# Altium PCB WAVE_RESHAPE.PcbDoc
Units mil, origin at the board's own origin, x right, y up, seen from the top; angles counter-clockwise.
Board outline 10535 x 6300 mil, 2 copper layers (Top Layer, Bottom Layer), stack 61.811 mil thick; 29 components, 21 nets, 80 pads, 3 vias.
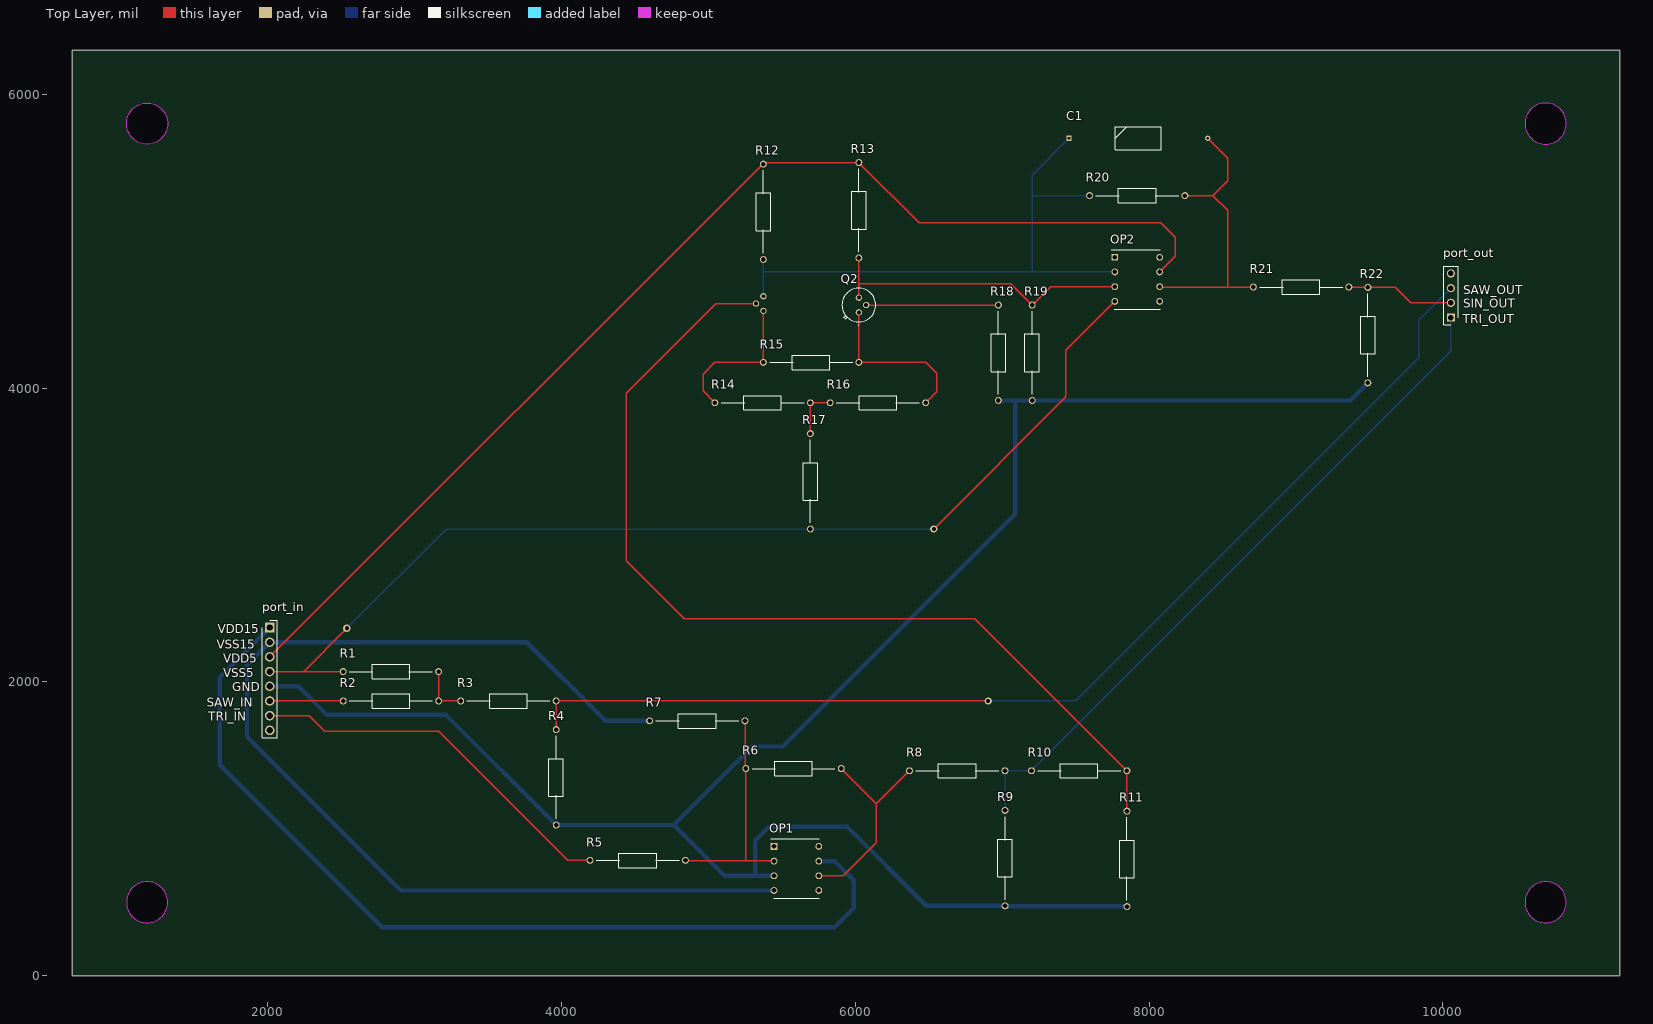
[diagram p0: Top Layer view]
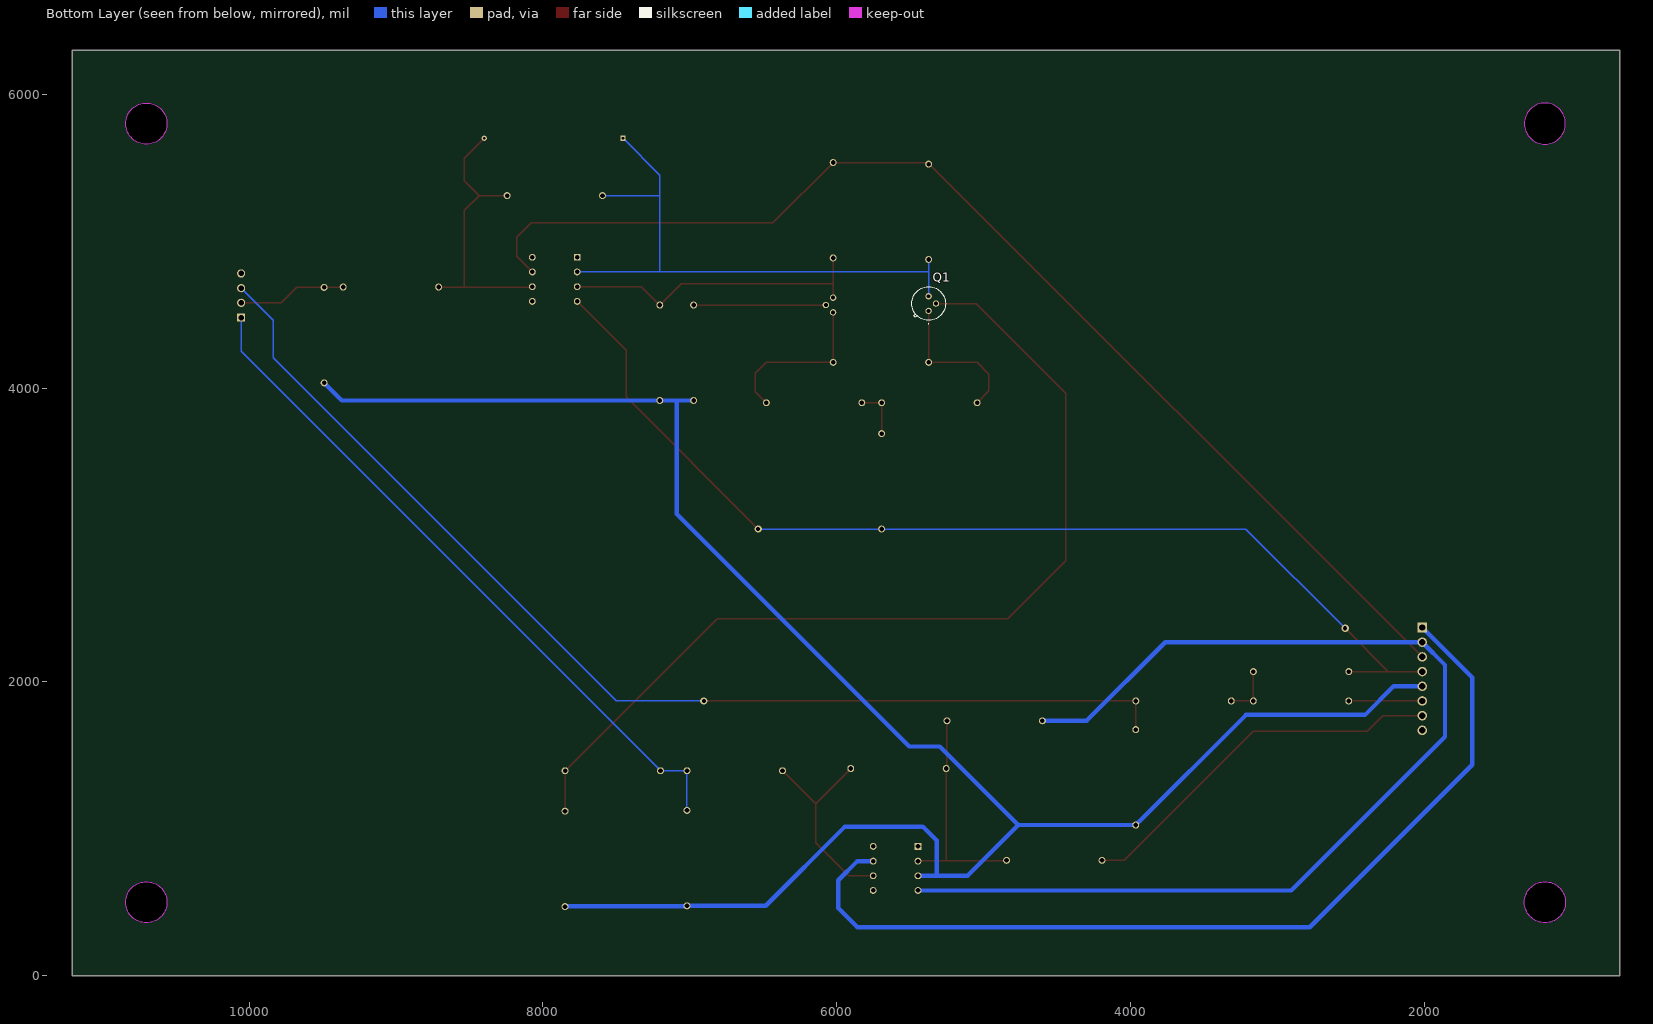
[diagram p1: Bottom Layer view, seen from below]
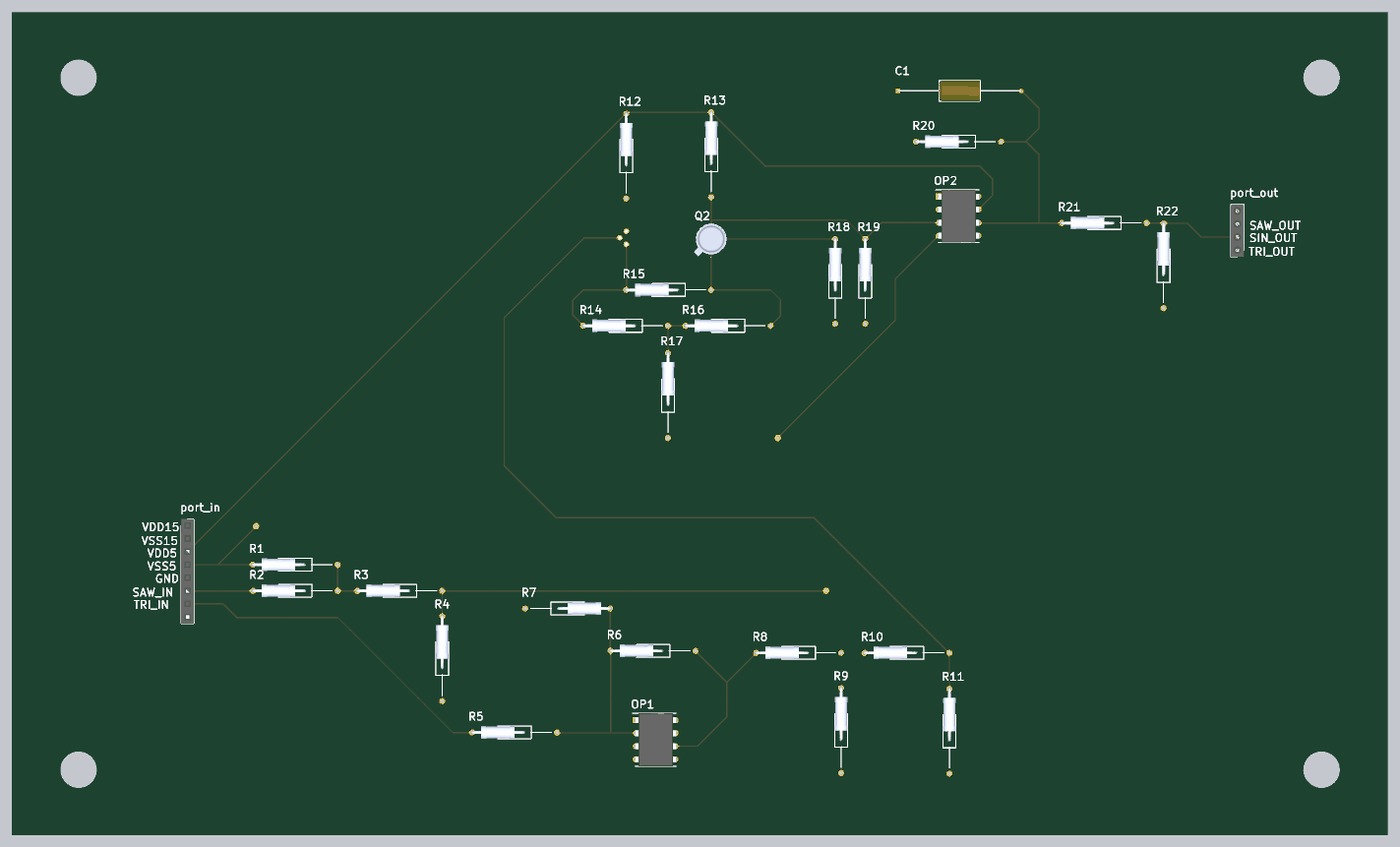
[diagram p2: 3D render of the assembled board from above, using the file's embedded part models]

## Layer stack, top to bottom
Top Solder: solder mask 0.5, Solder Resist, Dk 3.5
Top Layer: signal copper 1.378
Dielectric 1: dielectric 59.055, FR-4, Dk 4.5
Bottom Layer: signal copper 1.378
Bottom Solder: solder mask 0.5, Solder Resist, Dk 3.5

## Board outline
670,0 670,6300 11205,6300 11205,0
cut-out: 1180,5660 cw(c1180,5800) 1040,5800 cw(c1180,5800) 1180,5940 cw(c1180,5800) 1320,5800 cw(c1180,5800)
cut-out: 10560,5800 ccw(c10700,5800) 10700,5660 ccw(c10700,5800) 10840,5800 ccw(c10700,5800) 10700,5940 ccw(c10700,5800)
cut-out: 10560,500 ccw(c10700,500) 10700,360 ccw(c10700,500) 10840,500 ccw(c10700,500) 10700,640 ccw(c10700,500)
cut-out: 1040,500 ccw(c1180,500) 1180,360 ccw(c1180,500) 1320,500 ccw(c1180,500) 1180,640 ccw(c1180,500)

## Design rules (kind name [scope] priority, off if disabled: settings)
Clearance [All] p1: gap=10 ignorepadtopadclearanceinfootprint=FALSE
PolygonConnect [All] p1: connectstyle=Relief reliefconductorwidth=10 reliefentries=4 polygonreliefangle="90 Angle" airgapwidth=10
RoutingVias [All] p1: holewidth=28 width=50 viastyle="Through Hole" minholewidth=28 minwidth=50 maxholewidth=28 maxwidth=50
SolderMaskExpansion [All] p1: expansion=4 istentingtop=FALSE
SupplyNets "Schematic Supply Nets_4" [InNet('VDD5')] p1: voltage=0.000
SupplyNets "Schematic Supply Nets_3" [InNet('VDD15')] p2: voltage=0.000
SupplyNets "Schematic Supply Nets_2" [InNet('VSS5')] p3: voltage=0.000
SupplyNets "Schematic Supply Nets_1" [InNet('VSS15')] p4: voltage=0.000
SupplyNets "Schematic Supply Nets" [InNet('GND')] p5: voltage=0.000
Width [All] p1: maxlimit=30 minlimit=10 preferedwidth=10 minimp=50.000000 maximp=50.000000 favimp=50.000000
30 further rules are at their usual default settings.

## Components (designator, comment, footprint, x,y, rotation, side; value= is the part's Value field where it differs from the comment)
C1 "100p" CAPPA2400W30L800D400 7455,5700 r0 top
OP1 "OP27AZ" DIP775W58P254L1029H508Q8N 5600,730 r0 top
OP2 "OP27AZ" DIP775W58P254L1029H508Q8N 7920,4740 r0 top
port_in "929870-01-08-RA" 929870-01-08-RA 2015,2370 r270 top
port_out "929870-01-04-RA" RHDR4W76P0X254_1X4_1016X254X826P 10055,4480 r90 top
Q1 "2N2222A" CENTRAL_TO18 5375,4575 r90 bottom
Q2 "2N2222A" CENTRAL_TO18 6025,4565 r90 top
R1 "10k" RESAD1650W60L650D250 2515,2070 r0 top
R2 "10k" RESAD1650W60L650D250 2515.39,1870 r0 top
R3 "30k" RESAD1650W60L650D250 3315,1870 r0 top
R4 "25k" RESAD1650W60L650D250 3965,1675 r270 top
R5 "51k" RESAD1650W60L650D250 4195,785 r0 top
R6 "100k" RESAD1650W60L650D250 5255.39,1410 r0 top
R7 "300k" RESAD1650W60L650D250 5250,1735 r180 top
R8 "40k" RESAD1650W60L650D250 6370,1395 r0 top
R9 "13k" RESAD1650W60L650D250 7020,1125 r270 top
R10 "40k" RESAD1650W60L650D250 7200,1395 r0 top
R11 "10k" RESAD1650W60L650D250 7850,1120 r270 top
R12 "4.7k" RESAD1650W60L650D250 5375,5524.61 r270 top
R13 "4.7k" RESAD1650W60L650D250 6025,5535 r270 top
R14 "250" RESAD1650W60L650D250 5045,3900 r0 top
R15 "390" RESAD1650W60L650D250 5375,4175 r0 top
R16 "250" RESAD1650W60L650D250 5830,3900 r0 top
R17 "10k" RESAD1650W60L650D250 5695,3690 r270 top
R18 "2.2k" RESAD1650W60L650D250 6975,4565 r270 top
R19 "4.7k" RESAD1650W60L650D250 7205,4565 r270 top
R20 "4.7k" RESAD1650W60L650D250 7595,5310 r0 top
R21 "10k" RESAD1650W60L650D250 8710.52,4687.5 r0 top
R22 "10k" RESAD1650W60L650D250 9490,4685 r270 top

## Footprints (in the part's own frame and the unit in brackets; to place one, negate y for a bottom-side part, rotate by r counter-clockwise, add the part's x,y. Pads: shape width x height; smd on the part's side, far side on the other; paste and mask are expansions set on the pad)
929870-01-08-RA [mm]
  rect 1.65x1.65 hole 1.1: 1(0,0)
  round 1.65 hole 1.1: 2(2.54,0) 3(5.08,0) 4(7.62,0) 5(10.16,0) 6(12.7,0) 7(15.24,0) 8(17.78,0)
  silkscreen extent -1.27,-1.27 19.05,1.27, body extent -1.27,-1.27 19.05,1.27, height 3.8
CAPPA2400W30L800D400 [mm]
  rect 0.9x0.9 hole 0.5: 1(0,0)
  round 0.9 hole 0.5: 2(24,0)
  silkscreen extent 8,-2 16,2, body extent -0.15,-2 24.15,2, height 3.99
CENTRAL_TO18 [mm]
  round 1.1 hole 0.68: 1(-1.27,0) 2(0,-1.27) 3(1.27,0)
  silkscreen extent -3.53,-2.92 2.92,2.92, body extent -3.34,-2.92 2.91,3.34, height 5.33
DIP775W58P254L1029H508Q8N [mm]
  rect 1.18x1.18 hole 0.78: 1(-3.875,3.81)
  round 1.18 hole 0.78: 2(-3.875,1.27) 3(-3.875,-1.27) 4(-3.875,-3.81) 5(3.875,-3.81) 6(3.875,-1.27) 7(3.875,1.27) 8(3.875,3.81)
  silkscreen extent -4.46,-5.15 3.94,5.15, body extent -4.02,-5.15 4.02,5.15, height 5.08
RESAD1650W60L650D250 [mm]
  round 1.2 hole 0.8: 1(0,0) 2(16.5,0)
  silkscreen extent 1.08,-1.25 15.42,1.25, body extent -0.3,-1.25 10.3,1.25, height 2.55
RHDR4W76P0X254_1X4_1016X254X826P [mm]
  rect 1.425x1.425 hole 0.95: 1(0,0)
  round 1.425 hole 0.95: 2(2.54,0) 3(5.08,0) 4(7.62,0)
  silkscreen extent -1.27,-1.27 8.89,1.27, body extent -1.27,-1.27 8.89,1.27, height 8.26

## Part data
C1: library part 0113207, "Capacitor", Manufacturer_Name="RS Pro", Datasheet Link=https://docs.rs-online.com/d68c/0900766b8157e121.pdf, Manufacturer_Part_Number=0113207
OP1 OP2: "Integrated Circuit", Manufacturer_Name="Analog Devices", Mouser Part Number=700-OP27AZNR, Arrow Part Number=OP27AZ, Arrow Price/Stock=https://www.arrow.com/en/products/op27az/analog-devices, Datasheet Link=https://www.analog.com/media/en/technical-documentation/data-sheets/OP27.pdf, Height=5.08mm, Manufacturer_Part_Number=OP27AZ, Mouser Price/Stock=https://www.mouser.co.uk/ProductDetail/Maxim-Integrated/OP27AZ?qs=7RslVrYcaDTFV9h3XrpsTA%3D%3D
port_in: "Connector", Manufacturer_Name=3M, Mouser Part Number=517-929870-01-08-RA, Arrow Part Number=929870-01-08-RA, Arrow Price/Stock=https://www.arrow.com/en/products/929870-01-08-ra/3m?utm_currency=USD&region=nac, Datasheet Link=https://componentsearchengine.com/Datasheets/2/929870-01-08-RA.pdf, Height=3.8mm, Manufacturer_Part_Number=929870-01-08-RA, Mouser Price/Stock=https://www.mouser.co.uk/ProductDetail/3M-Electronic-Solutions-Division/929870-01-08-RA?qs=neFkstNq%252B6FsuK7vJEiMKg%3D%3D
port_out: "Connector", Manufacturer_Name=3M, Mouser Part Number=517-929870-01-04-RA, Arrow Part Number=929870-01-04-RA, Arrow Price/Stock=https://www.arrow.com/en/products/929870-01-04-ra/3m, Datasheet Link=https://componentsearchengine.com/Datasheets/2/929870-01-04-RA.pdf, Height=8.26mm, Manufacturer_Part_Number=929870-01-04-RA, Mouser Price/Stock=https://www.mouser.co.uk/ProductDetail/3M-Electronic-Solutions-Division/929870-01-04-RA?qs=neFkstNq%252B6GPZEKactAgTg%3D%3D
Q1 Q2: "Transistor BJT NPN", Manufacturer_Name="Central Semiconductor", Mouser Part Number=610-2N2222A, Arrow Part Number=2N2222A, Arrow Price/Stock=https://www.arrow.com/en/products/2n2222a/central-semiconductor?utm_currency=USD&region=nac, Datasheet Link=https://my.centralsemi.com/get_document.php?cmp=1&mergetype=pd&mergepath=pd&pdf_id=2N2221A.PDF, Manufacturer_Part_Number=2N2222A, Mouser Price/Stock=https://www.mouser.com/Search/Refine.aspx?Keyword=610-2N2222A
R1 R2 R3 R4 R5 R6 R7 R8 R9 R10 R11 R12 R13 R14 R15 R16 R17 R18 R19 R20 R21 R22: library part MRS25000C1003FC100, "Resistor", Manufacturer_Name=Vishay, Mouser Part Number=594-MRS25000C1003FC1, Arrow Part Number=MRS25000C1003FC100, Arrow Price/Stock=https://www.arrow.com/en/products/mrs25000c1003fc100/vishay?region=nac, Datasheet Link=http://www.vishay.com/docs/28724/mrs16m25.pdf, Manufacturer_Part_Number=MRS25000C1003FC100, Mouser Price/Stock=https://www.mouser.co.uk/ProductDetail/Vishay-BC-Components/MRS25000C1003FC100?qs=H30XFsNYD%2FHyk6mBpuomxg%3D%3D

## Via types
v1: diameter 50, hole 28, Top Layer to Bottom Layer, 3 vias

## Nets (pads, with @x,y where several pads share a name; then routed paths per layer and width w, separated by ;. In a path a pad name is that pad's centre, name@x,y a point inside that pad or via, vN(x,y) a via of type N, cw(c..) or ccw(c..) an arc to the next point about the centre after c; other vN are vias at no path point)
GND: OP1.3 port_in.5 R4.2 R9.2 R11.2 R18.2 R19.2 R22.2 | length 13541.6
  Bottom Layer w10: R9.2 R9.2@7022.5,472.89 ; R11.2@7847.5,472.89 R11.2
  Bottom Layer w30: port_in.5 2210,1970 2405,1775 3215.39,1775 R4.2 4764.61,1025.39 ; OP1.3 5320,680 ; R18.2 7090,3915.39 ; R9.2 6484.61,475.39 5945,1015 5415,1015 5320,920 5320,680 ; R9.2@7022.5,472.89 R11.2@7847.5,472.89 ; R22.2 9370,3915.39 R19.2 7090,3915.39 ; 4764.61,1025.39 5299.21,1560 5507.49,1560 7090,3142.51 7090,3915.39 ; 4764.61,1025.39 5110,680 5320,680
NetC1_1: C1.1 OP2.2 Q1.3 R12.2 R20.1 | length 4056.4
  Bottom Layer w10: Q1.3 5375,4790 ; R12.2@5375,4885.39 5375,4790 ; C1.1 7205,5450 7205,5310 ; R20.1 7205,5310 ; OP2.2 7205,4790 ; 5375,4790 7205,4790 ; 7205,4790 7205,5310
NetC1_2: C1.2 OP2.6 R20.2 R21.1 | length 1980.7
  Top Layer w10: OP2.6 8075.06,4687.5 8535,4687.5 ; R20.2 8435,5310 ; C1.2 8535,5564.88 8535,5410 8435,5310 ; R21.1 8535,4687.5 ; 8435,5310 8535,5210 8535,4687.5
NetOP1_2: OP1.2 R5.2 R6.1 R7.1 | length 1559.8
  Top Layer w10: R5.2 4847.11,782.5 5255,782.5 ; R7.1 5252.7,1732.3 5252.7,1412.7 R6.1 5255.39,782.89 5255,782.5 ; OP1.2 5444.94,782.5 5255,782.5
NetOP1_6: OP1.6 R6.2 R8.1 | length 1411.6
  Top Layer w10: OP1.6 5920,680 6145,905 6145,1170 ; R6.2 6145,1170 ; R8.1@6372.38,1397.38 6145,1170
NetOP2_3: OP2.3 Q2.3 R13.2 R19.1 | length 2124.7
  Top Layer w10: Q2.3 6025,4710 ; R13.2 6025,4710 ; OP2.3 7330,4690 R19.1 7060,4710 6025,4710
Netport_in_6: port_in.6 R2.1 | length 500.4
  Top Layer w10: port_in.6 R2.1
Netport_in_7: port_in.7 R5.1 | length 2588
  Top Layer w10: port_in.7 2285,1770 2390,1665 3165,1665 4045,785 R5.1
Netport_out_1: port_out.1 R8.2 R9.1 R10.1 | length 4718.1
  Top Layer w10: R8.2 R8.2@7019.8,1394.8 ; R9.1@7019.8,1125.2 R9.1
  Bottom Layer w10: R8.2 R10.1 10055,4250 port_out.1 ; R9.1@7019.8,1125.2 R8.2@7019.8,1394.8
Netport_out_2: port_out.2 R21.2 R22.1 | length 739.4
  Top Layer w10: R21.2 9361.38,4686.25 9488.75,4686.25 R22.1 9675,4685 9780,4580 port_out.2
Netport_out_3: port_out.3 R3.2 R4.1 | length 7598.9
  Top Layer w10: R4.1 3964.8,1675.2 3964.8,1869.8 R3.2 v1(6905,1870)
  Bottom Layer w10: v1(6905,1870) 7500,1870 9835,4205 9835,4460 port_out.3
NetQ1_1: Q1.1 R14.1 R15.1 | length 1021.3
  Top Layer w10: R14.1 4965,3980 4965,4095 5045,4175 R15.1 Q1.1
NetQ1_2: Q1.2 R10.2 R11.1 | length 6554.8
  Top Layer w10: Q1.2 5050,4575 4440,3965 4440,2825 4835,2430 6814.61,2430 R10.2 7849.8,1394.8 7849.8,1120.2 R11.1
NetQ2_1: Q2.1 R15.2 R16.2 | length 1132.9
  Top Layer w10: Q2.1 6024.8,4514.8 6024.8,4175.2 R15.2 6480,4175 6555,4100 6555,3975.39 R16.2
NetQ2_2: Q2.2 R18.1 | length 900
  Top Layer w10: Q2.2 R18.1
NetR1_2: R1.2 R2.2 R3.1 | length 350.2
  Top Layer w10: R1.2 3164.8,2069.8 3164.8,1870.2 R2.2 R3.1
NetR14_2: R14.2 R16.1 R17.1 | length 345.6
  Top Layer w10: R17.1 5694.8,3690.2 5694.8,3899.8 R14.2 R16.1
VDD5: OP2.7 port_in.3 R12.1 R13.1 | length 8045.3
  Top Layer w10: port_in.3 5369.61,5524.61 R12.1 ; R12.1@5375,5535 R13.1 6435,5125 8080,5125 8180,5025 8180,4897.44 OP2.7
VDD15: OP1.7 port_in.1 | length 6383.7
  Bottom Layer w30: port_in.1 1675,2030 1675,1435 2780,330 5860,330 5990,460 5990,650 5860,780 OP1.7
VSS5: OP2.4 port_in.4 R1.1 R17.2 | length 7252.3
  Top Layer w10: port_in.4 2245,2070 ; R1.1 2245,2070 ; v1(2540,2365) 2245,2070 ; v1(6535.39,3040.39) 7435,3940 7435,4257.56 OP2.4
  Bottom Layer w10: v1(2540,2365) 3215.39,3040.39 R17.2 v1(6535.39,3040.39)
VSS15: OP1.4 port_in.2 R7.2 | length 7535.6
  Bottom Layer w30: R7.2 4300,1735 3765,2270 port_in.2 1860,2115 1860,1626.57 2906.57,580 OP1.4
pads on no net: OP1.1 OP1.5 OP1.8 OP2.1 OP2.5 OP2.8 port_in.8 port_out.4

## Silkscreen, mask and mechanical layers (free items; w line width, h text height)
Top Overlay:
  text "SAW_OUT" at 10140,4640 h60
  text "SIN_OUT" at 10140,4545 h60
  text "TRI_OUT" at 10135,4440 h60
  text "VDD15" at 1660,2330 h60
  text "VSS15" at 1655,2225 h60
  text "VDD5" at 1700,2130 h60
  text "VSS5" at 1700,2030 h60
  text "GND" at 1760,1935 h60
  text "SAW_IN" at 1585,1830 h60
  text "TRI_IN" at 1595,1735 h60
Mechanical 1:
  circle w10: c1180,5800 r140
  circle w10: c10700,5800 r140
  circle w10: c10700,500 r140
  circle w10: c1180,500 r140
  pour cut-out: 1180,5660 cw(c1180,5800) 1040,5800 cw(c1180,5800) 1180,5940 cw(c1180,5800) 1320,5800 cw(c1180,5800)
  lines w10: 670,0 11205,0 11205,6300 670,6300 670,0